# EAGLE board Batterycharger004 (EAGLE 7.1.0)
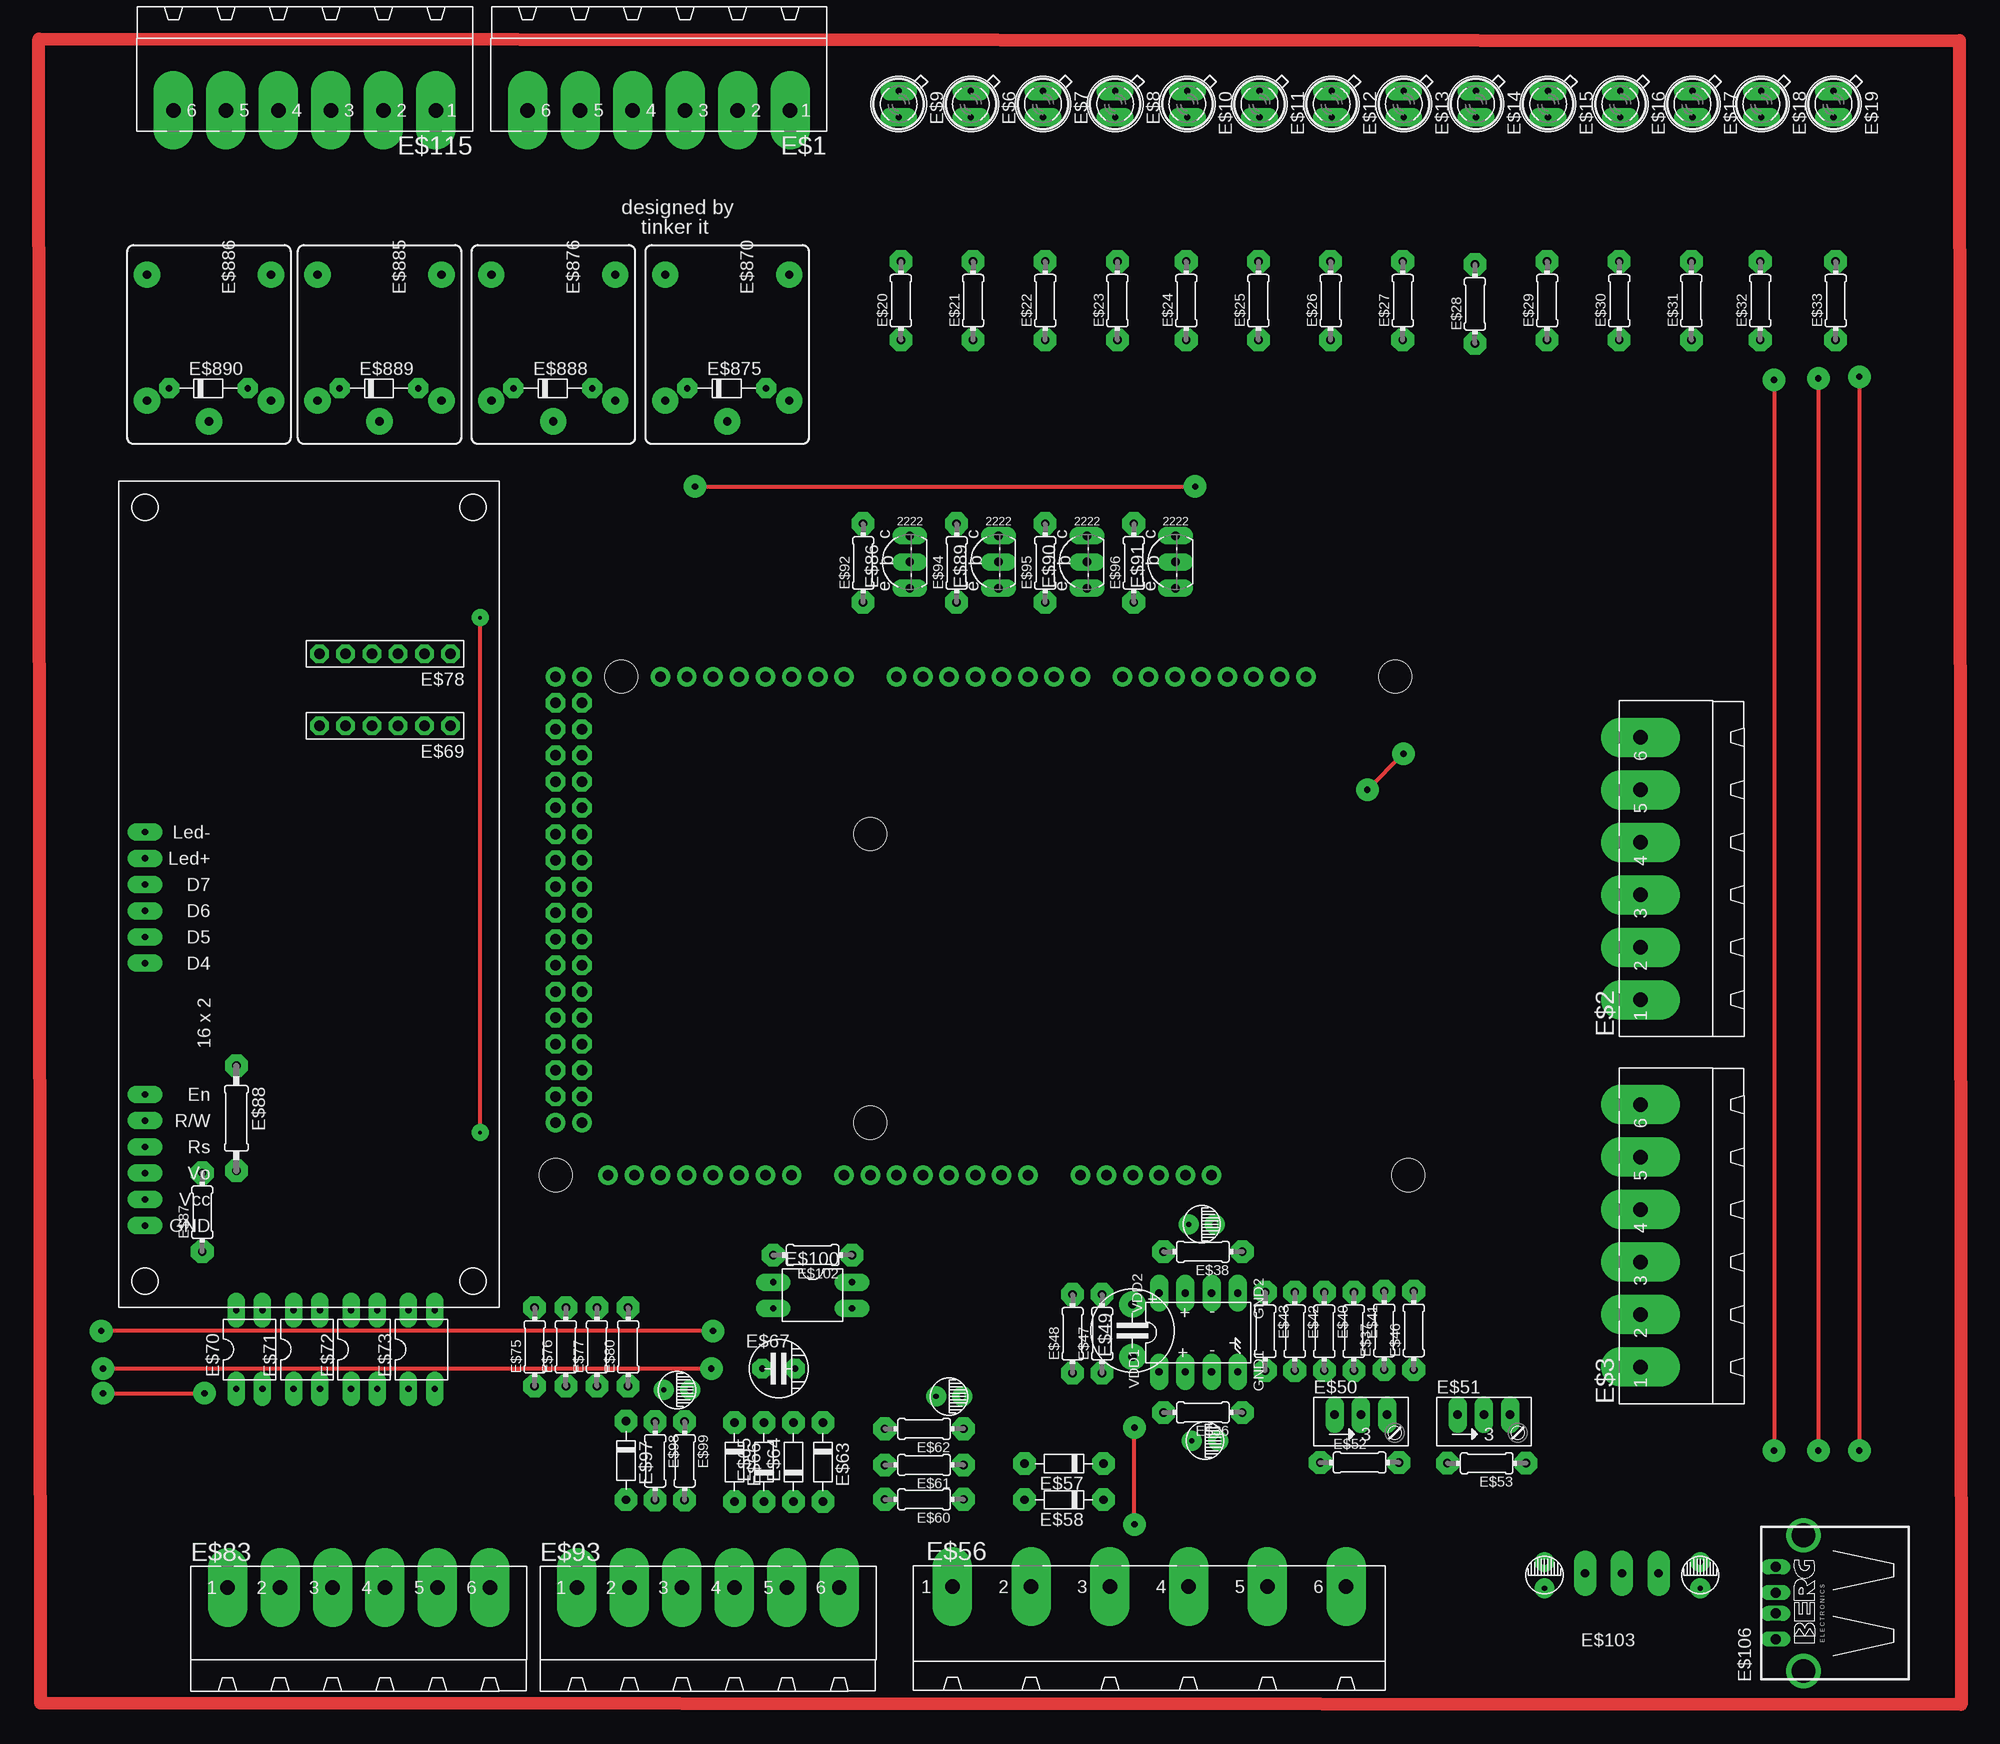
[diagram p0: board, top side]
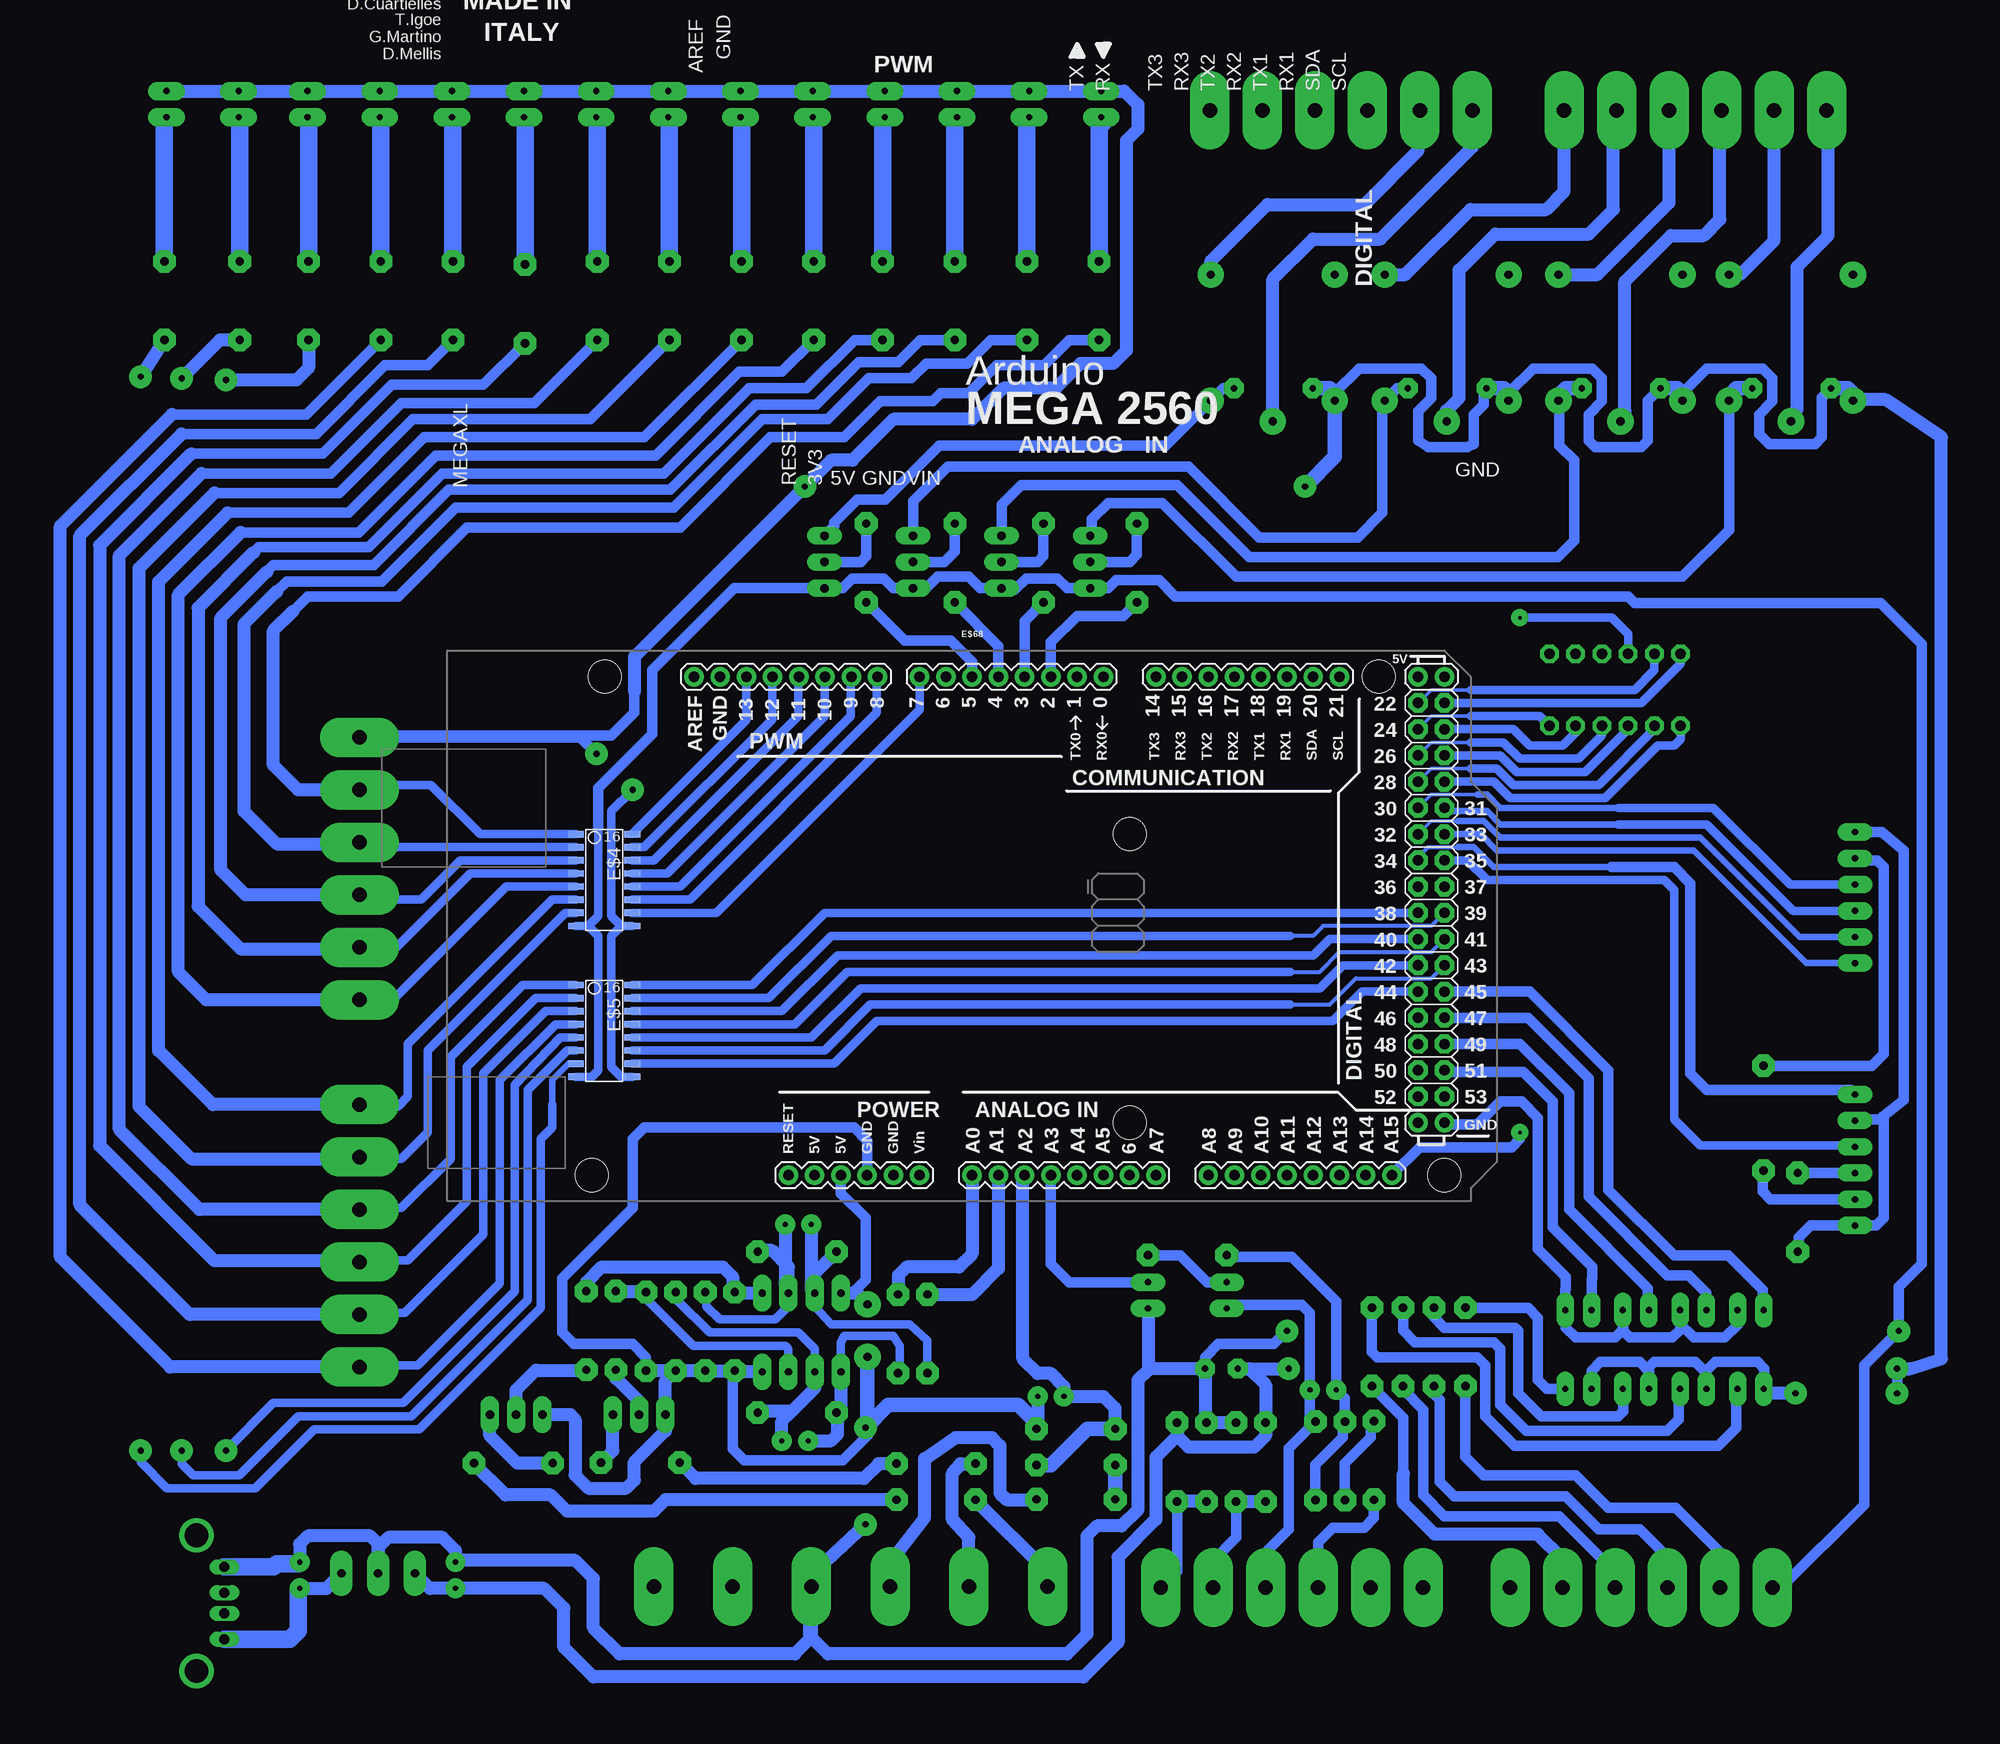
[diagram p1: board, bottom side, seen from below]

No outline drawn. Coordinates in mm, seen from the top.
Copper layers (1*16): Top 0.035mm / dielectric 1.5mm / Bottom 0.035mm
Design rules "default *": minimum track width 0.15mm, minimum drill 0.3mm, track to track 0.15mm, track to pad 0.1mm, pad to pad 0.15mm, via to via 0.15mm, smd to smd 0.15mm, copper to edge 0.6mm, drill to drill 0.3mm, minimum pad ring 10mil, minimum via ring 10mil, stop-mask expansion 2mil, vias tented up to drill 1mil, thermal gap 10mil

## Footprints (pad centres in the part's own frame; a part is rotated, then mirrored left to right if it is on the bottom)
CONNECTOR-1X6 = drill 1.397 pad 3.81 long: 1 -12.7,0; 2 -7.62,0; 3 -2.54,0; 4 2.54,0; 5 7.62,0; 6 12.7,0
SO-16 = smd 0.61 x 1.524: 1 -4.445,-2.794; 2 -3.175,-2.794; 3 -1.905,-2.794; 4 -0.635,-2.794; 5 0.635,-2.794; 6 1.905,-2.794; 7 3.175,-2.794; 8 4.445,-2.794; 9 4.445,2.667; 10 3.175,2.667; 11 1.905,2.667; 12 0.635,2.667; 13 -0.635,2.667; 14 -1.905,2.667; 15 -3.175,2.667; 16 -4.445,2.667
SFH480 = drill 0.61 pad 1.778 long: A 1.27,0; K -1.27,0
0204/7 = drill 0.813 pad 2.184 octagon: 1 -3.81,0; 2 3.81,0
DIL08 = drill 0.7 pad 1.778 long: 1 -3.81,-3.81; 2 -1.27,-3.81; 3 1.27,-3.81; 4 3.81,-3.81; 5 3.81,3.81; 6 1.27,3.81; 7 -1.27,3.81; 8 -3.81,3.81
C2-3 = drill 0.5 pad 1.93: P$1 1.27,0; P$2 -1.27,0
CAP-1 = drill 0.813 pad 2.54: P$1 -2.54,0; P$2 2.54,0
POT_001 = drill 0.813 pad 1.778 long: A 2.54,2.54; E -2.54,2.54; S 0,2.54
SCREW_TERMINAL_01 = drill 1.397 pad 3.81 long: 1 -19.05,5.08; 2 -11.43,5.08; 3 -3.81,5.08; 4 3.81,5.08; 5 11.43,5.08; 6 19.05,5.08
D7.5 = drill 0.813 pad 2.184 octagon: A 3.81,0; C -3.81,0
C5-4 = drill 0.61 pad 1.93 octagon: 1 -1.587,0; 2 1.587,0
ARDUINO_MEGA = drill 1.016 pad 1.88: 0 13.97,24.13; 1 11.43,24.13; 2 8.89,24.13; 3 6.35,24.13; 3.3V -13.97,-24.13; 4 3.81,24.13; 5 1.27,24.13; 5V@0 -11.43,-24.13; 5V@1 44.45,24.13; 5V@2 46.99,24.13; 6 -1.27,24.13; 7 -3.81,24.13; 8 -7.874,24.13; 9 -10.414,24.13; 10 -12.954,24.13; 11 -15.494,24.13; 12 -18.034,24.13; 13 -20.574,24.13; 14 19.05,24.13; 15 21.59,24.13; 16 24.13,24.13; 17 26.67,24.13; 18 29.21,24.13; 19 31.75,24.13; 20 34.29,24.13; 21 36.83,24.13; A0 1.27,-24.13; A1 3.81,-24.13; A2 6.35,-24.13; A3 8.89,-24.13; A4 11.43,-24.13; A5 13.97,-24.13; A6 16.51,-24.13; A7 19.05,-24.13; A8 24.13,-24.13; A9 26.67,-24.13; A10 29.21,-24.13; A11 31.75,-24.13; A12 34.29,-24.13; A13 36.83,-24.13; A14 39.37,-24.13; A15 41.91,-24.13; AREF -25.654,24.13; GND@0 -8.89,-24.13; GND@1 -6.35,-24.13; GND@2 44.45,-19.05; GND@3 46.99,-19.05; GND@4 -23.114,24.13; RESET -16.51,-24.13; VIN -3.81,-24.13 | drill 1.016 pad 1.88 octagon: 22 44.45,21.59; 23 46.99,21.59; 24 44.45,19.05; 25 46.99,19.05; 26 44.45,16.51; 27 46.99,16.51; 28 44.45,13.97; 29 46.99,13.97; 30 44.45,11.43; 31 46.99,11.43; 32 44.45,8.89; 33 46.99,8.89; 34 44.45,6.35; 35 46.99,6.35; 36 44.45,3.81; 37 46.99,3.81; 38 44.45,1.27; 39 46.99,1.27; 40 44.45,-1.27; 41 46.99,-1.27; 42 44.45,-3.81; 43 46.99,-3.81; 44 44.45,-6.35; 45 46.99,-6.35; 46 44.45,-8.89; 47 46.99,-8.89; 48 44.45,-11.43; 49 46.99,-11.43; 50 44.45,-13.97; 51 46.99,-13.97; 52 44.45,-16.51; 53 46.99,-16.51 | hole 3.2: -34.29,24.13; -35.56,-24.13; 16.51,8.89; 16.51,-19.05; 40.64,24.13; 46.99,-24.13
1X06-BIG = drill 1.016 pad 1.778 octagon: 1 -6.35,0; 2 -3.81,0; 3 -1.27,0; 4 1.27,0; 5 3.81,0; 6 6.35,0
DIL04 = drill 0.61 pad 1.676 long: 1 -1.27,-3.81; 2 1.27,-3.81; 3 1.27,3.81; 4 -1.27,3.81
LCD_16_2 = drill 0.61 pad 1.676 long: P$1 -16.192,0; P$2 -13.652,0; P$3 -11.113,0; P$4 -8.572,0; P$5 -6.032,0; P$6 16.828,0; P$7 14.287,0; P$8 11.748,0; P$9 9.207,0; P$10 6.668,0; P$22 -18.733,0; P$23 19.367,0
PN2222A = drill 0.813 pad 1.676 long: B 2.54,0; C 0,0; E -2.54,0
0207/10 = drill 0.813 pad 2.184 octagon: 1 -5.08,0; 2 5.08,0
TIP122 = drill 0.813 pad 2.184 long: 1 -3.556,0; 2 0,0; 3 3.556,0
PN87520-S = drill 0.95 long: 1 -3.5,2.71; 2 -1,2.71; 3 1,2.71; 4 3.5,2.71 | drill 2.3 pad 2.9: S1 -6.57,0; S2 6.57,0
JS-M = drill 0.8 pad 2.54: 1 6.7,6; 2 6.7,-6; C 8.7,0; NC -5.5,-6; NO -5.5,6
D-5 = drill 0.61 pad 1.93 octagon: A 3.81,0; C -3.81,0

## Placement (x,y rotation side)
E$1  [CONNECTOR-1X6]  -87.15,40.56 180 top
E$2  [CONNECTOR-1X6]  7.86,-32.86 90 top
E$3  [CONNECTOR-1X6]  7.86,-68.42 90 top
E$4  [SO-16]  -15.88,-33.97 270 bottom
E$5  [SO-16]  -15.88,-48.58 270 bottom
E$6  [SFH480]  -56.96,41.16 270 top
E$7  [SFH480]  -49.97,41.16 270 top
E$8  [SFH480]  -42.99,41.16 270 top
E$9  [SFH480]  -63.94,41.16 270 top
E$10  [SFH480]  -36,41.16 270 top
E$11  [SFH480]  -29.02,41.16 270 top
E$12  [SFH480]  -22.03,41.16 270 top
E$13  [SFH480]  -15.05,41.16 270 top
E$14  [SFH480]  -8.06,41.16 270 top
E$15  [SFH480]  -1.08,41.16 270 top
E$16  [SFH480]  5.91,41.16 270 top
E$17  [SFH480]  12.89,41.16 270 top
E$18  [SFH480]  19.56,41.16 270 top
E$19  [SFH480]  26.55,41.16 270 top
E$20  [0204/7]  -63.73,22.13 90 top
E$21  [0204/7]  -56.74,22.13 90 top
E$22  [0204/7]  -49.76,22.13 90 top
E$23  [0204/7]  -42.77,22.13 90 top
E$24  [0204/7]  -36.11,22.13 90 top
E$25  [0204/7]  -29.12,22.13 90 top
E$26  [0204/7]  -22.14,22.13 90 top
E$27  [0204/7]  -15.15,22.13 90 top
E$28  [0204/7]  -8.17,21.81 90 top
E$29  [0204/7]  -1.18,22.13 90 top
E$30  [0204/7]  5.8,22.13 90 top
E$31  [0204/7]  12.79,22.13 90 top
E$32  [0204/7]  19.46,22.13 90 top
E$33  [0204/7]  26.76,22.13 90 top
E$34  [DIL08]  -34.92,-77.79 0 top
E$36  [0204/7]  -34.49,-85.52 180 top
E$37  [0204/7]  -16.94,-77.59 90 top
E$38  [0204/7]  -34.49,-69.97 180 top
E$40  [0204/7]  -22.74,-77.67 270 top
E$41  [0204/7]  -19.89,-77.67 270 top
E$42  [0204/7]  -25.6,-77.67 270 top
E$43  [0204/7]  -28.46,-77.67 270 top
E$44  [C2-3]  -34.29,-88.27 0 top
E$45  [C2-3]  -34.61,-67.31 0 top
E$46  [0204/7]  -14.09,-77.59 90 top
E$47  [0204/7]  -44.25,-77.9 90 top
E$48  [0204/7]  -47.11,-77.9 90 top
E$49  [CAP-1]  -41.31,-77.6 90 top
E$50  [POT_001]  -19.21,-88.27 0 top
E$51  [POT_001]  -7.3,-88.27 0 top
E$52  [0204/7]  -19.32,-90.37 0 top
E$53  [0204/7]  -7.03,-90.44 180 top
E$56  [SCREW_TERMINAL_01]  -39.69,-107.47 0 top
E$57  [D7.5]  -47.94,-90.49 180 top
E$58  [D7.5]  -47.94,-93.98 180 top
E$59  [C2-3]  -59.05,-83.98 0 top
E$60  [0204/7]  -61.48,-93.94 180 top
E$61  [0204/7]  -61.48,-90.6 180 top
E$62  [0204/7]  -61.48,-87.11 180 top
E$63  [D7.5]  -71.28,-90.33 270 top
E$64  [D7.5]  -74.14,-90.33 90 top
E$65  [D7.5]  -76.99,-90.33 90 top
E$66  [D7.5]  -79.85,-90.33 270 top
E$67  [C5-4]  -75.56,-81.28 0 top
E$68  [ARDUINO_MEGA]  -50.16,-38.42 0 bottom
E$69  [1X06-BIG]  -113.67,-19.05 180 top
E$70  [DIL04]  -126.79,-79.42 0 top
E$71  [DIL04]  -121.24,-79.42 0 top
E$72  [DIL04]  -115.68,-79.42 0 top
E$73  [DIL04]  -110.12,-79.42 0 top
E$75  [0204/7]  -99.18,-79.17 90 top
E$76  [0204/7]  -96.16,-79.17 90 top
E$77  [0204/7]  -93.14,-79.17 90 top
E$78  [1X06-BIG]  -113.67,-12.06 180 top
E$80  [0204/7]  -90.13,-79.17 90 top
E$82  [LCD_16_2]  -136.9,-48.7 90 top
E$83  [CONNECTOR-1X6]  -116.2,-102.47 0 top
E$86  [PN2222A]  -62.87,-3.17 90 top
E$87  [0204/7]  -131.36,-66.14 90 top
E$88  [0207/10]  -128.05,-57.05 270 top
E$89  [PN2222A]  -54.29,-3.17 90 top
E$90  [PN2222A]  -45.72,-3.17 90 top
E$91  [PN2222A]  -37.15,-3.17 90 top
E$92  [0204/7]  -67.38,-3.27 90 top
E$93  [CONNECTOR-1X6]  -82.39,-102.47 0 top
E$94  [0204/7]  -58.33,-3.27 90 top
E$95  [0204/7]  -49.76,-3.27 90 top
E$96  [0204/7]  -41.19,-3.27 90 top
E$97  [D7.5]  -90.33,-90.17 270 top
E$98  [0204/7]  -87.51,-90.21 270 top
E$99  [0204/7]  -84.66,-90.21 270 top
E$100  [DIL04]  -72.28,-74.18 270 top
E$101  [C2-3]  -85.41,-83.34 0 top
E$102  [0204/7]  -72.27,-70.28 180 top
E$103  [TIP122]  6.06,-101.1 0 top
E$104  [C2-3]  -1.43,-101.28 90 top
E$105  [C2-3]  13.65,-101.28 90 top
E$106  [PN87520-S]  23.65,-103.98 90 top
E$115  [CONNECTOR-1X6]  -121.44,40.56 180 top
E$870  [JS-M]  -80.54,19.14 270 top
E$875  [D-5]  -80.59,13.64 0 top
E$876  [JS-M]  -97.37,19.14 270 top
E$885  [JS-M]  -114.19,19.14 270 top
E$886  [JS-M]  -130.71,19.14 270 top
E$888  [D-5]  -97.42,13.64 0 top
E$889  [D-5]  -114.25,13.64 0 top
E$890  [D-5]  -130.76,13.64 0 top

## Library data of the parts
E$1-E$3 E$34 E$44 E$45 E$50 E$51 E$56-E$59 E$63-E$67 E$83 E$93 E$97 E$101 E$104 E$105 E$115 = PERSONAL
E$4 E$5 = texas
E$6-E$19 = led
E$20-E$33 E$36-E$38 E$40-E$43 E$46-E$48 E$52 E$53 E$60-E$62 E$75-E$77 E$80 E$87 E$88 E$92 E$94-E$96 E$98 E$99 E$102 = resistor
E$49 E$82 = PERSONAL1
E$68 = SparkFun-Boards
E$69 E$78 = adafruit
E$70-E$73 E$100 = ic-package
E$86 E$89-E$91 = PERSONAL6
E$103 = PERSONAL3
E$106 = con-berg
E$870 E$876 E$885 E$886 = relay
E$875 E$888-E$890 = diode

## Nets
PA0: E$68.22 E$78.5
PA1: E$68.23 E$78.6
PA2: E$68.24 E$69.1
PA3: E$68.25 E$69.2
PA4: E$68.26 E$69.3
PA5: E$68.27 E$69.4
PA6: E$68.28 E$69.5
PA7: E$68.29 E$69.6
PK7: E$68.A15 E$78.4
S$2: E$2.5 E$4.1 E$20.1
S$3: E$2.4 E$4.2 E$21.1
S$4: E$2.3 E$4.3 E$22.1
S$5: E$2.2 E$4.4 E$23.1
S$7: E$2.1 E$4.5 E$24.1
S$8: E$3.6 E$4.6 E$25.1
S$9: E$4.16 E$68.13
S$11: E$4.15 E$68.12
S$12: E$68.33 E$82.P$10
S$13: E$68.32 E$82.P$9
S$14: E$68.31 E$82.P$8
S$15: E$68.30 E$82.P$7
S$16: E$68.34 E$82.P$5
S$17: E$68.35 E$82.P$3
S$18: E$82.P$4 E$82.P$22 E$82.P$23 E$87.1
S$19: E$82.P$2 E$87.2
S$20: E$82.P$1 E$88.2
S$21: E$82.P$6 E$88.1
S$22: E$91.B E$870.1 E$875.A
S$24: E$90.B E$876.1 E$888.A
S$25: E$73.2 E$75.2
S$26: E$86.C E$92.2
S$27: E$89.C E$94.2
S$28: E$90.C E$95.2
S$29: E$91.C E$96.2
S$30: E$68.2 E$92.1
S$32: E$4.14 E$68.11
S$33: E$68.3 E$94.1
S$35: E$68.4 E$95.1
S$36: E$68.5 E$96.1
S$37: E$4.13 E$68.10
S$38: E$4.12 E$68.9
S$39: E$4.11 E$68.8
S$40: E$3.5 E$4.7 E$26.1
S$41: E$3.4 E$5.1 E$27.1
S$42: E$3.3 E$5.2 E$28.1
S$43: E$3.2 E$5.3 E$29.1
S$44: E$3.1 E$5.4 E$30.1
S$45: E$9.A E$20.2
S$46: E$6.A E$21.2
S$47: E$7.A E$22.2
S$48: E$8.A E$23.2
S$49: E$10.A E$24.2
S$50: E$11.A E$25.2
S$51: E$12.A E$26.2
S$52: E$13.A E$27.2
S$53: E$14.A E$28.2
S$54: E$15.A E$29.2
S$55: E$16.A E$30.2
S$56: E$17.A E$31.2
S$57: E$18.A E$32.2
S$59: E$19.A E$33.2
S$61: E$5.5 E$31.1
S$62: E$4.10 E$68.7
S$63: E$115.6 E$886.C
S$64: E$68.45 E$70.4
S$65: E$5.16 E$68.38
S$66: E$5.15 E$68.39
S$67: E$5.14 E$68.40
S$68: E$5.13 E$68.41
S$69: E$5.12 E$68.42
S$70: E$5.11 E$68.43
S$71: E$5.10 E$68.44
S$72: E$52.1 E$57.C
S$73: E$34.2 E$36.1 E$40.1 E$44.P$1
S$74: E$34.3 E$37.2 E$41.1
S$75: E$34.1 E$36.2 E$44.P$2 E$47.1
S$76: E$34.5 E$43.1 E$46.2
S$77: E$34.6 E$38.1 E$42.1 E$45.P$1
S$78: E$34.7 E$38.2 E$45.P$2 E$48.1
S$80: E$2.6 E$4.9 E$5.9 E$6.K E$7.K E$8.K E$9.K E$10.K E$11.K E$12.K E$13.K E$14.K E$15.K E$16.K E$17.K E$18.K E$19.K E$63.C E$66.C E$67.1 E$70.1 E$71.1 E$72.1 E$73.1 E$103.1 E$104.P$2 E$870.2 E$875.C E$876.2 E$885.2 E$886.2 E$888.C E$889.C E$890.C
S$81: E$34.8 E$49.P$2 E$68.5V@0
S$82: E$47.2 E$68.A0
S$83: E$48.2 E$68.A1
S$84: E$37.1 E$50.S
S$85: E$46.1 E$51.S
S$86: E$56.3 E$60.1
S$87: E$50.A E$52.2
S$88: E$51.A E$53.2
S$89: E$53.1 E$58.C
S$90: E$56.1 E$58.A
S$91: E$56.2 E$57.A
S$92: E$115.5 E$886.NO
S$93: E$60.2 E$61.2
S$94: E$59.P$2 E$61.1 E$62.2 E$68.A2
S$95: E$72.2 E$76.2
S$97: E$63.A E$64.C E$93.6
S$98: E$65.C E$66.A E$93.5
S$99: E$5.6 E$32.1
S$100: E$5.7 E$33.1
S$101: E$71.2 E$77.2
S$102: E$70.2 E$80.2
S$103: E$80.1 E$83.5
S$104: E$77.1 E$83.4
S$105: E$76.1 E$83.3
S$106: E$75.1 E$83.2
S$108: E$68.47 E$71.4
S$109: E$68.49 E$72.4
S$110: E$68.51 E$73.4
S$112: E$68.GND@3 E$70.3 E$71.3 E$72.3 E$73.3
S$113: E$93.3 E$97.A
S$114: E$97.C E$98.2
S$115: E$98.1 E$99.2 E$101.P$2 E$102.2
S$116: E$93.4 E$99.1 E$100.2 E$101.P$1
S$117: E$100.1 E$102.1
S$118: E$68.A3 E$100.4
S$119: E$103.3 E$105.P$2 E$106.1
S$120: E$115.4 E$885.C
S$121: E$115.3 E$885.NO
S$122: E$115.2 E$876.C
S$123: E$115.1 E$876.NO
S$124: E$1.6 E$870.C
S$125: E$1.5 E$870.NO
S$126: E$4.8 E$5.8 E$34.4 E$40.2 E$41.2 E$42.2 E$43.2 E$49.P$1 E$50.E E$51.E E$56.4 E$59.P$1 E$62.1 E$64.A E$65.A E$67.2 E$68.GND@0 E$83.1 E$86.E E$89.E E$90.E E$91.E E$100.3 E$103.2 E$104.P$1 E$105.P$1 E$106.4
S$677: E$89.B E$885.1 E$889.A
S$679: E$86.B E$886.1 E$890.A

## Tracks (layer width: path | path; a pad name or v marks a point on that pad's centre or on a via)
PA0
  Bottom 0.356: E$68.22 -95.89,-15.56 -99.69,-15.56
  Bottom 0.813: -99.69,-15.56 -115.57,-15.56 -117.47,-13.65 E$78.5
PA1
  Bottom 0.813: E$68.23 -116.2,-16.83 -120.02,-13.02 E$78.6
PA2
  Bottom 0.356: E$68.24 -95.89,-18.1 -99.69,-18.1
  Bottom 0.813: -99.69,-18.1 -106.36,-18.1 E$69.1
PA3
  Bottom 0.813: E$68.25 -103.82,-19.37 -105.41,-20.95 -108.58,-20.95 -109.86,-19.68 E$69.2
PA4
  Bottom 0.356: E$68.26 -95.89,-20.64 -99.69,-20.64
  Bottom 0.813: -99.69,-20.64 -102.87,-20.64 -104.46,-22.23 -110.17,-22.23 -112.39,-20 E$69.3
PA5
  Bottom 0.813: E$68.27 -102.55,-21.91 -104.14,-23.5 -110.81,-23.5 -114.94,-19.37 E$69.4
PA6
  Bottom 0.356: E$68.28 -95.89,-23.18 -99.69,-23.18
  Bottom 0.813: -99.69,-23.18 -102.23,-23.18 -103.82,-24.77 -112.08,-24.77 -117.47,-19.37 E$69.5
PA7
  Bottom 0.813: E$69.6 -120.02,-20.32 -119.38,-20.95 -117.79,-20.95 -112.71,-26.04 -103.5,-26.04 -101.92,-24.45 E$68.29
PK7  (via drill 0.35 pad 1.65)
  Top 0.406: v-104.46,-58.42 v-104.46,-8.57
  Bottom 0.813: v-104.46,-8.57 -113.35,-8.57 -114.94,-10.16 E$78.4
  Bottom 1.016: E$68.A15 -94.78,-59.84 -103.67,-59.84 -104.46,-59.05 v-104.46,-58.42
S$2
  Bottom 0.813: E$4.1 -3.81,-29.53 0.95,-24.77 7.38,-24.77 E$2.5
  Bottom 1.016: E$20.1 -60.86,18.32 -58.42,15.88 -53.82,15.88 -51.12,13.18 -48.42,13.18 -47.62,12.38 -42.55,12.38 -39.05,8.89 -31.91,8.89 -23.18,0.16 -2.54,0.16 4.13,-6.51 12.86,-6.51 14.29,-7.94
  Bottom 1.27: E$2.5 13.81,-25.24 16.19,-22.86 16.19,-9.84 14.29,-7.94
S$3
  Bottom 0.813: E$4.2 7.38,-30.8 E$2.4
  Bottom 1.016: E$21.1 -53.24,18.32 -50.96,16.03 -46.99,16.03 -45.56,14.61 -41.43,14.61 -37.47,10.64 -31.11,10.64 -22.54,2.06 -1.43,2.06 5.71,-5.08 14.92,-5.08 15.95,-6.11
  Bottom 1.27: 15.88,-6.03 15.95,-6.11 19.05,-9.21 19.05,-27.3 15.88,-30.48 8.02,-30.48 E$2.4
S$4
  Bottom 0.813: E$4.3 -1.91,-32.07 1.91,-35.88 7.38,-35.88 E$2.3
  Bottom 1.016: E$22.1 -46.41,18.32 -44.29,16.19 -40.48,16.19 -36.35,12.06 -30.48,12.06 -22.23,3.81 -0.79,3.81 6.51,-3.49 16.19,-3.49 16.83,-4.13
  Bottom 1.27: E$2.3 18.89,-35.4 21.27,-33.02 21.27,-8.57 16.83,-4.13
S$5
  Bottom 0.813: E$4.4 -2.86,-33.34 4.45,-40.64 7.7,-40.64 E$2.2
  Bottom 1.016: E$23.1 -40.06,18.32 -35.4,13.65 -29.84,13.65 -21.59,5.4 -0.16,5.4 6.99,-1.75 17.62,-1.75 18.1,-2.22
  Bottom 1.27: 18.1,-2.22 23.5,-7.62 23.5,-36.51 19.37,-40.64 8.02,-40.64 E$2.2
S$7
  Bottom 0.813: E$4.5 -6.35,-34.61 4.45,-45.4 7.7,-45.4 E$2.1
  Bottom 1.016: 19.37,-0.32 7.94,-0.32 0.48,7.14 -20.8,7.14 -28.89,15.24 -33.03,15.24 E$24.1
  Bottom 1.27: E$2.1 22.7,-45.56 25.4,-42.86 25.4,-6.35 19.37,-0.32
S$8
  Bottom 0.813: E$4.6 -10.79,-35.88 3.17,-49.85 3.17,-54.93 4.13,-55.88 7.7,-55.88 E$3.6 7.7,-55.56
  Bottom 1.016: 20.64,1.59 8.89,1.59 1.59,8.89 -19.7,8.89 E$25.1
  Bottom 1.27: E$3.6 22.07,-55.72 27.3,-50.48 27.3,-5.08 20.64,1.59
S$9
  Bottom 0.813: E$4.16 -29.59,-18.48 E$68.13
S$11
  Bottom 0.813: E$4.15 -19.68,-30.8 -32.07,-18.41 -32.07,-14.35 E$68.12
S$12
  Bottom 0.61: E$68.33 -100.65,-29.53 -102.23,-31.11 -121.28,-31.11 -132.2,-42.03 E$82.P$10
S$13
  Bottom 0.356: E$68.32 -95.89,-28.26 -98.42,-28.26
  Bottom 0.61: E$82.P$9 -131.56,-39.49 -121.92,-29.84 -102.55,-29.84 -100.97,-28.26 -98.42,-28.26
S$14
  Bottom 0.61: E$68.31 -97.47,-27.3 -101.28,-27.3 -102.55,-28.57 -113.98,-28.57
  Bottom 0.813: E$82.P$8 -130.93,-36.95 -122.56,-28.57 -113.98,-28.57
S$15
  Bottom 0.356: E$68.30 -95.89,-25.72 -100.33,-25.72
  Bottom 0.61: -113.98,-26.99 -102.55,-26.99 -101.28,-25.72 -100.33,-25.72
  Bottom 0.813: E$82.P$7 -130.61,-34.41 -123.19,-26.99 -113.98,-26.99
S$16
  Bottom 0.406: E$68.34 -94.61,-31.75 -95.57,-30.8 -98.42,-30.8
  Bottom 0.61: -98.42,-30.8 -100.01,-30.8 -101.92,-32.7 -113.35,-32.7
  Bottom 1.016: -113.35,-32.7 -119.38,-32.7 -120.97,-34.29 -120.97,-52.7 -122.56,-54.29 -136.47,-54.29 E$82.P$5
S$17
  Bottom 0.813: E$68.35 -99.38,-32.07 -101.28,-33.97 -118.43,-33.97 -119.38,-34.92 -119.38,-57.15 -121.92,-59.69 -136.78,-59.69 E$82.P$3
S$18
  Bottom 1.016: E$82.P$23 -139.5,-29.33 -141.6,-31.11 -141.6,-55.24 -139.7,-56.83 | E$87.1 -131.44,-69.86 -131.44,-68.58 -132.6,-67.43 E$82.P$22 -138.95,-67.43 -139.7,-66.67 -139.7,-56.83 | -139.7,-56.83 -139.38,-57.15 -137.02,-57.15 E$82.P$4
S$19
  Bottom 1.016: E$87.2 -136.88,-62.33 E$82.P$2
S$20
  Bottom 1.016: E$82.P$1 -128.71,-64.89 -127.95,-64.14 -127.95,-62.23 E$88.2
S$21
  Bottom 1.016: E$88.1 -138.53,-51.97 -139.7,-50.8 -139.7,-32.7 -139.06,-32.07 -137.1,-32.07 E$82.P$6
S$22
  Bottom 1.016: E$875.A -75.74,13.64 E$870.1 -70.19,8.1 -48.26,8.1 -43.02,2.86 -40.32,2.86 -38.1,0.64 -38.1,0.32 E$91.B
S$24
  Bottom 1.016: E$90.B -45.72,2.7 -49.05,6.03 -72.39,6.03 -79.22,-0.79 -88.74,-0.79 -91.12,1.59 -91.12,12.2 E$876.1 -92.57,13.64 E$888.A
S$25
  Bottom 1.016: E$73.2 -107.05,-83.23 -106.2,-82.39 -106.2,-76.36 -105.25,-75.41 -99.22,-75.41 E$75.2
S$26
  Bottom 1.016: E$92.2 -67.38,-2.47 -66.67,-3.17 E$86.C
S$27
  Bottom 1.016: E$94.2 -58.33,-2.63 -57.78,-3.17 E$89.C
S$28
  Bottom 1.016: E$95.2 -49.76,-2.15 -48.74,-3.17 E$90.C
S$29
  Bottom 1.016: E$96.2 -41.19,-2.63 -40.64,-3.17 E$91.C
S$30
  Bottom 1.016: E$68.2 -59.05,-10.95 -61.59,-8.41 -66.05,-8.41 E$92.1
S$32
  Bottom 0.813: E$4.14 -20.64,-32.07 -34.61,-18.1 -34.61,-14.35 E$68.11
S$33
  Bottom 1.016: E$68.3 -56.52,-8.9 E$94.1
S$35
  Bottom 1.016: E$68.4 -53.98,-11.3 E$95.1
S$36
  Bottom 1.016: E$68.5 -51.44,-12.86 -49.37,-10.79 -44.9,-10.79 E$96.1
S$37
  Bottom 0.813: E$4.13 -21.91,-33.34 -37.15,-18.1 -37.15,-14.35 E$68.10
S$38
  Bottom 0.813: E$4.12 -23.18,-34.61 -39.69,-18.1 -39.69,-14.35 E$68.9
S$39
  Bottom 0.813: E$4.11 -24.13,-35.88 -42.23,-17.78 -42.23,-14.35 E$68.8
S$40
  Bottom 0.813: E$4.7 -12.06,-37.15 1.27,-50.48 1.27,-58.42 3.81,-60.96 7.7,-60.96 E$3.5 7.38,-60.33
  Bottom 1.016: 21.91,3.49 9.84,3.49 2.7,10.64 -14.46,10.64 E$26.1
  Bottom 1.27: 21.91,3.49 29.21,-3.81 29.21,-55.88 24.13,-60.96 8.02,-60.96 E$3.5
S$41
  Bottom 0.813: E$3.4 4.76,-65.88 | 4.76,-65.88 4.6,-65.88 | E$5.1 -7.94,-44.13 -0.95,-51.12 -0.95,-60.96 3.81,-65.72 4.6,-65.72 4.76,-65.88
  Bottom 1.016: 23.18,5.4 10.64,5.4 3.81,12.22 -9.06,12.22 E$27.1
  Bottom 1.27: E$3.4 23.34,-65.88 31.11,-58.1 31.11,-2.54 23.18,5.4
S$42
  Bottom 0.813: E$3.3 4.92,-70.96 4.76,-70.8 3.17,-70.8 -2.54,-65.09 -2.54,-52.07 -9.21,-45.4 E$5.2
  Bottom 1.016: 24.13,7.3 11.43,7.3 4.76,13.97 -4.14,13.97 E$28.1
  Bottom 1.27: 24.13,7.3 33.02,-1.59 33.02,-59.69 21.91,-70.8 8.02,-70.8 E$3.3
S$43
  Bottom 0.813: E$3.2 5.56,-76.04 5.4,-75.88 3.49,-75.88 -4.13,-68.26 -4.13,-52.7 -10.16,-46.67 E$5.3
  Bottom 1.016: 25.08,9.21 12.06,9.21 5.4,15.88 1.26,15.88 E$29.1
  Bottom 1.27: E$3.2 24.29,-76.04 34.92,-65.41 34.92,-0.64 25.08,9.21
S$44
  Bottom 0.813: E$3.1 5.87,-81.12 5.71,-80.96 2.22,-80.96 -5.71,-73.03 -5.71,-53.34 -11.11,-47.94 E$5.4
  Bottom 1.016: 26.04,11.11 13.01,11.11 E$30.1
  Bottom 1.27: E$3.1 26.19,-81.12 36.83,-70.48 36.83,0.32 26.04,11.11 | 5.71,18.23 E$30.1
S$45
  Bottom 1.676: E$20.2 -63.73,38.96 -64.14,39.37 -64.14,39.69 E$9.A
S$46
  Bottom 1.676: E$21.2 -56.74,39.67 E$6.A
S$47
  Bottom 1.676: E$22.2 -49.76,39.67 E$7.A
S$48
  Bottom 1.676: E$23.2 -42.77,39.67 E$8.A
S$49
  Bottom 1.676: E$24.2 -36.11,39.78 E$10.A
S$50
  Bottom 1.676: E$25.2 -29.12,39.78 E$11.A
S$51
  Bottom 1.676: E$26.2 -22.14,39.78 E$12.A
S$52
  Bottom 1.676: E$27.2 -15.15,39.78 E$13.A
S$53
  Bottom 1.676: E$28.2 -8.17,39.78 E$14.A
S$54
  Bottom 1.676: E$29.2 -1.18,39.78 E$15.A
S$55
  Bottom 1.676: E$30.2 5.8,39.78 E$16.A
S$56
  Bottom 1.676: E$31.2 12.79,39.78 E$17.A
S$57
  Bottom 1.676: E$32.2 19.46,39.78 E$18.A
S$59
  Bottom 1.676: E$33.2 26.76,39.67 E$19.A
S$61  (via drill 0.6 pad 2.18)
  Top 0.406: v20.8,14.45 v20.8,-89.22
  Bottom 0.813: v20.8,-89.22 16.19,-84.61 3.65,-84.61 -7.14,-73.82 -7.14,-53.82 -11.59,-49.21 E$5.5
  Bottom 1.27: E$31.1 12.79,15.63 13.97,14.45 v20.8,14.45
S$62
  Bottom 0.813: E$4.10 -26.67,-37.15 -46.35,-17.46 E$68.7
S$63
  Bottom 1.27: E$886.C -130.71,11.01 -131.29,11.59 -131.29,25.4 -134.3,28.42 -134.3,40.4 E$115.6
S$64
  Bottom 1.016: -128.06,-74.56 E$70.4 -127.95,-75.5 -127.95,-73.66 -124.62,-70.33 -119.38,-70.33 -113.03,-63.98 -113.03,-52.39 -105.41,-44.77 E$68.45
S$65
  Bottom 0.813: E$68.38 -37.15,-37.15 -30.16,-44.13 E$5.16
S$66
  Bottom 0.406: E$68.39 -95.89,-38.42 -85.41,-38.42 -84.45,-39.37 -82.23,-39.37
  Bottom 0.813: -82.23,-39.37 -37.78,-39.37 -31.75,-45.4 E$5.15
S$67
  Bottom 0.813: E$68.40 -86.04,-39.69 -84.45,-41.27 -38.42,-41.27 -33.02,-46.67 E$5.14
S$68
  Bottom 0.406: -82.23,-42.86 -85.09,-42.86 -87,-40.96 -95.89,-40.96 E$68.41
  Bottom 0.813: E$5.13 -34.29,-47.94 -39.37,-42.86 -82.23,-42.86
S$69
  Bottom 0.813: E$68.42 -87.31,-42.23 -85.09,-44.45 -40.64,-44.45 -35.88,-49.21 E$5.12
S$70
  Bottom 0.406: -82.23,-46.04 -86.04,-46.04 -88.58,-43.5 -95.89,-43.5 E$68.43
  Bottom 0.813: E$5.11 -37.15,-50.48 -41.59,-46.04 -82.23,-46.04
S$71
  Bottom 0.813: E$68.44 -89.22,-44.77 -86.36,-47.62 -42.23,-47.62 -38.1,-51.75 E$5.10
S$72
  Bottom 1.27: E$57.C -42.39,-90.49 -40.96,-91.92 -24.68,-91.92 E$52.1
S$73
  Bottom 0.813: E$34.2 -36.2,-79.38 -34.61,-77.79 -26.04,-77.79 -22.86,-74.61 -22.86,-73.98 E$40.1
  Bottom 1.27: E$34.2 -36.2,-83.19 -33.97,-85.41 | -33.97,-85.41 -30.8,-85.41 E$36.1 | E$44.P$1 -33.02,-86.36 -33.97,-85.41
S$74
  Bottom 0.813: E$34.3 -33.66,-79.38 -33.34,-79.06 -24.45,-79.06 -20,-74.61 -20,-73.98 E$41.1
  Bottom 1.27: E$41.1 -17.03,-73.86 E$37.2
S$75
  Bottom 0.813: E$34.1 -38.73,-78.74 -39.05,-78.11 -43.81,-78.11 -44.45,-79.06 -44.45,-81.51 E$47.1
  Bottom 1.27: E$34.1 -38.73,-85.09 E$36.2 -38.42,-85.64 -38.42,-87.63 -37.78,-88.27 E$44.P$2
S$76
  Bottom 1.27: E$34.5 -28.57,-73.98 E$43.1 -28.26,-73.66 -28.26,-72.39 -27.3,-71.44 -15.56,-71.44 -14.09,-72.91 E$46.2
S$77
  Bottom 0.813: E$34.6 -33.66,-75.25 -32.38,-76.52 -26.99,-76.52 -25.72,-75.25 -25.72,-73.98 E$42.1
  Bottom 1.27: E$34.6 -33.66,-73.34 | -33.66,-73.34 -33.66,-71.44 -32.07,-69.85 -30.8,-69.85 E$38.1 | E$45.P$1 -33.34,-73.03 -33.66,-73.34
S$78
  Bottom 0.813: E$48.1 -47.11,-78.54 -45.4,-76.99 -37.78,-76.99 -36.2,-75.25 E$34.7
  Bottom 1.27: E$38.2 -36.2,-72.07 E$34.7 -35.88,-73.66 E$45.P$2
S$79
  Top 1.27: -147.16,47.47 38.73,47.31 38.89,-113.82 -147,-113.67 -147.16,47.47
S$80  (via drill 0.6 pad 2.18)
  Top 0.406: v-82.07,-81.28 v-140.97,-81.28 | v-83.66,4.13 v-35.24,4.13 | v-140.97,-83.66 v-131.13,-83.66 | v-15.08,-21.75 v-18.57,-25.24
  Bottom 0.813: 2.86,-20 7.7,-20 | E$5.9 -17.46,-53.02 -16.51,-52.07 -16.51,-39.37 -17.46,-38.42 | E$4.9 -17.46,-38.42 | -17.46,-38.42 -16.51,-37.47 -16.51,-27.3 v-18.57,-25.24
  Bottom 1.016: E$870.2 -86.54,13.2 -88.9,15.56 -94.93,15.56 -95.89,14.61 -95.89,12.7 -94.61,11.43 -94.61,8.57 -95.57,7.94 -99.38,7.94 -100.01,8.26 -100.01,11.11 -100.97,12.06 -100.97,13.38 E$888.C -101.28,13.7 | E$876.2 -103.37,13.2 -105.73,15.56 -111.44,15.56 -112.39,14.61 -112.39,12.38 -111.12,11.11 -111.12,8.57 -111.76,7.94 -116.2,7.94 -116.84,8.57 -116.84,12.43 E$889.C | -120.33,13.02 -120.33,13.34 -122.56,15.56 -127.95,15.56 -128.91,14.61 -128.91,12.38 -127.64,11.11 -127.64,9.21 -128.59,8.26 -133.03,8.26 -133.67,8.89 -133.67,12.75 E$890.C | E$73.1 -111.39,-81.49 -112.24,-80.64 -116.05,-80.64 -117,-81.6 -117,-83.19 E$72.1 -116.95,-81.17 -117.47,-80.64 -121.44,-80.64 -122.4,-81.6 -122.4,-83.12 E$71.1 -122.51,-81.49 -123.35,-80.64 -127.48,-80.64 -128.11,-81.28 -128.11,-83.19 E$70.1 | -141.13,-81.44 v-140.97,-81.28 v-140.97,-83.66 | -18.73,-15.72 -18.73,-17.78 -16.51,-20 7.7,-20 E$2.6 -13.49,-20.16 v-15.08,-21.75
  Bottom 1.27: E$19.K E$18.K E$17.K E$16.K E$15.K E$14.K E$13.K E$12.K E$11.K E$10.K E$8.K E$7.K E$6.K E$9.K -66.16,42.42 -67.47,41.12 -67.47,38.73 -66.36,37.62 -66.36,17.3 -65.09,16.03 -61.91,16.03 -59.53,13.65 -54.45,13.65 -51.44,10.64 -43.81,10.64 -39.85,6.67 -37.78,6.67 v-35.24,4.13 -18.73,-12.38 -18.73,-15.72 | -71.28,-87.79 -72.39,-88.9 -78.74,-88.9 -79.85,-87.79 E$66.C -79.85,-82.87 -78.26,-81.28 E$67.1 v-82.07,-81.28 | v-140.97,-81.28 -142.24,-81.28 -145.26,-80.33 -145.26,8.89 -139.86,12.54 -136.8,12.54 E$886.2 | v-131.13,-83.66 -128.49,-83.66 E$70.1 | E$103.1 1.05,-102.55 E$104.P$2 -10,-102.55 -11.91,-104.46 -11.91,-108.27 -14.76,-111.12 -62.23,-111.12 -65.56,-107.79 -65.56,-99.54 -69.22,-95.89 -69.22,-89.85 -71.28,-87.79 | E$63.C -71.28,-87.79
  Bottom 1.422: E$875.C -86.05,13.64 -86.36,13.34 -86.36,12.62 E$870.2 -86.54,7.01 v-83.66,4.13 | E$888.C -102.88,13.64 -103.19,13.34 -103.19,12.62 E$876.2 | E$889.C -119.71,13.64 -120.33,13.02 -120.33,12.58 E$885.2 | E$890.C -136.22,13.64 -136.84,13.02 -136.84,12.58 E$886.2
S$81
  Bottom 1.016: E$34.8 -39.85,-73.98 -41.12,-72.71 -41.12,-66.67 -38.73,-64.29 E$68.5V@0
  Bottom 1.27: E$49.P$2 -41.31,-74.97 -40.32,-73.98 E$34.8
S$82
  Bottom 1.27: E$68.A0 -51.44,-70.17 -50.16,-71.44 -45.09,-71.44 -44.29,-72.23 -44.29,-74.05 E$47.2
S$83
  Bottom 1.27: E$68.A1 -53.98,-71.6 -51.44,-74.14 -47.15,-74.14 E$48.2
S$84
  Bottom 1.27: E$50.S -19.21,-84.45 -16.99,-82.23 -16.99,-81.44 E$37.1
S$85
  Bottom 1.27: E$51.S -7.3,-83.34 -9.21,-81.44 -14.04,-81.44 E$46.1
S$86
  Bottom 1.27: E$56.3 -43.5,-100.01 -46.83,-95.73 -46.83,-90.01 -49.85,-87.95 -53.34,-87.95 -54.13,-88.74 -54.13,-93.34 -54.77,-93.98 -57.47,-93.98 E$60.1
S$87
  Bottom 1.27: E$52.2 -16.67,-89.22 E$50.A
S$88
  Bottom 1.27: E$53.2 -7.42,-90.44 -4.76,-87.79 E$51.A
S$89
  Bottom 1.27: E$58.C -21.75,-93.98 -20.64,-95.09 -12.22,-95.09 -10.64,-93.5 -6.28,-93.5 E$53.1
S$90
  Bottom 1.27: E$56.1 -58.74,-100.97 E$58.A
S$91
  Bottom 1.27: E$56.2 -51.12,-97.63 -49.53,-95.89 -49.53,-91.44 -50.32,-90.49 E$57.A
S$92
  Bottom 1.27: E$886.NO -125.77,24.64 -129.06,27.94 E$115.5
S$93
  Bottom 1.422: E$60.2 E$61.2
S$94
  Bottom 1.27: E$62.2 -65.25,-87.07 -65.25,-85.09 -64.14,-83.98 E$59.P$2 -60.33,-83.03 -59.05,-81.76 -57.78,-81.76 -56.36,-80.33 -56.36,-62.71 E$68.A2
  Bottom 1.422: E$62.2 -62.59,-87.11 -59.05,-90.65 -57.71,-90.65 E$61.1
S$95
  Bottom 1.016: E$76.2 -96.16,-76.32 -97.16,-77.31 -103.98,-77.31 -104.3,-77.63 -104.3,-83.66 -106.52,-85.88 -113.98,-85.88 -114.46,-85.41 -114.46,-83.28 E$72.2
S$97
  Bottom 1.016: E$63.A -71.28,-100.89 E$93.6
  Bottom 1.27: E$64.C E$63.A
S$98
  Bottom 1.016: E$65.C -76.99,-97.63 -74.61,-100.01 -74.61,-102.31 E$93.5
  Bottom 1.27: E$65.C E$66.A
S$99  (via drill 0.6 pad 2.18)
  Top 0.406: v25.08,14.61 v25.08,-89.22
  Bottom 0.813: v25.08,-89.22 25.08,-90.49 23.97,-91.6 19.53,-91.6 13.81,-85.88 2.86,-85.88 -8.41,-74.61 -8.41,-54.29 -12.22,-50.48 E$5.6
  Bottom 1.27: E$32.1 21.37,18.32 v25.08,14.61
S$100  (via drill 0.6 pad 2.18)
  Top 0.406: v29.05,14.76 v29.05,-89.22
  Bottom 0.61: E$5.7 -12.38,-51.75 -10.79,-53.34 -10.79,-55.72
  Bottom 0.813: v29.05,-89.22 29.05,-90.33 26.51,-92.87 17.94,-92.87 12.22,-87.15 2.06,-87.15 -9.68,-75.41 -9.68,-59.05 -10.79,-57.94 -10.79,-55.72
  Bottom 1.27: E$33.1 v29.05,14.76
S$101
  Bottom 1.016: E$77.2 -93.14,-77.59 -94.3,-78.74 -101.92,-78.74 -102.55,-79.38 -102.55,-84.77 -105.09,-87.31 -118.75,-87.31 -119.86,-86.2 -119.86,-83.34 E$71.2
S$102
  Bottom 1.016: E$80.2 -90.13,-79.65 -90.65,-80.17 -100.33,-80.17 -101.12,-80.96 -101.12,-85.88 -103.98,-88.74 -123.67,-88.74 -125.41,-87 -125.41,-83.34 E$70.2
S$103
  Bottom 1.016: -93.19,-91.44 -93.19,-86.04 E$80.1
  Bottom 1.27: E$83.5 -108.58,-99.69 -106.2,-97.31 -96.2,-97.31 -93.19,-94.3 -93.19,-91.44
S$104
  Bottom 1.016: E$77.1 -93.14,-83.3 -95.09,-85.25 -95.09,-93.5 -97.16,-95.57 -108.27,-95.57 -113.51,-100.81 -113.51,-102.31 E$83.4
S$105
  Bottom 1.016: E$76.1 -96.16,-83.78 -96.68,-84.3 -96.68,-92.23 -98.11,-93.66 -108.9,-93.66 -112.08,-96.84 -116.05,-96.84 -118.9,-99.69 -118.9,-102.31 E$83.3
S$106
  Bottom 1.016: E$75.1 -99.18,-89.81 -100.97,-91.6 -109.86,-91.6 -113.03,-94.77 -119.54,-94.77 -123.98,-99.22 -123.98,-102.31 E$83.2
S$108
  Bottom 1.016: E$71.4 -122.51,-73.93 -120.81,-72.23 -118.75,-72.23 -111.12,-64.61 -111.12,-53.18 -105.25,-47.31 E$68.47
S$109
  Bottom 1.016: E$72.4 -116.95,-75.09 | -116.95,-75.09 -116.95,-74.56 | E$68.49 -104.46,-49.85 -109.22,-54.61 -109.22,-65.88 -116.84,-73.5 -116.84,-74.98 -116.95,-75.09
S$110
  Bottom 1.016: E$73.4 -111.39,-72.66 -111.44,-72.61 -111.44,-71.44 -107.63,-67.63 -107.63,-55.4 -104.78,-52.55 -97.31,-52.55 E$68.51
S$112
  Bottom 1.016: E$70.3 -125.52,-77.04 -124.3,-78.26 -121.28,-78.26 -119.86,-76.83 -119.86,-75.72 E$71.3 -119.97,-77.52 -119.22,-78.26 -115.09,-78.26 -114.46,-77.63 -114.46,-75.66 E$72.3 -114.41,-77.52 -113.67,-78.26 -109.86,-78.26 -108.9,-77.31 -108.9,-75.66 E$73.3 -108.86,-73.61 -108.9,-73.56 -108.9,-72.39 -106.2,-69.69 -106.2,-56.99 -104.62,-55.4 -102.55,-55.4 -100.33,-57.63 -97.31,-57.63 E$68.GND@3
S$113
  Bottom 1.016: E$93.3 -84.93,-98.11 -86.36,-96.68 -89.38,-96.68 -90.33,-95.73 E$97.A
S$114
  Bottom 1.016: E$98.2 -87.51,-90.44 -90.01,-87.95 -90.01,-86.68 E$97.C
S$115
  Bottom 1.016: E$99.2 -84.66,-90.6 -87.31,-87.95 -87.31,-86.6 E$98.1 -87.51,-84.18 E$101.P$2 -86.68,-74.77 -82.39,-70.48 -76.28,-70.48 E$102.2
S$116
  Bottom 1.016: E$93.4 -79.85,-99.06 -82.07,-96.84 -82.07,-88.98 -84.26,-86.8 | -84.26,-86.8 E$99.1 | -84.26,-86.8 -84.14,-86.68 E$101.P$1 -84.14,-75.88 -83.34,-75.09 -76.46,-75.09 E$100.2
S$117
  Bottom 1.016: E$100.1 -74.18,-72.91 -71.6,-70.33 -68.51,-70.33 E$102.1
S$118
  Bottom 1.016: E$100.4 -60.85,-72.91 -59.05,-71.12 E$68.A3
S$119
  Bottom 1.27: E$105.P$2 11.07,-102.55 E$103.3
  Bottom 1.676: E$106.1 14.61,-107.48 13.81,-106.68 13.81,-102.71 E$105.P$2
S$120
  Bottom 1.27: E$885.C -114.19,11.01 -114.62,11.43 -114.62,23.97 -119.06,28.42 -122.24,28.42 -123.83,30 -123.83,40.4 E$115.4
S$121
  Bottom 1.27: E$885.NO -111.96,24.64 -118.9,31.59 E$115.3
S$122
  Bottom 1.27: E$876.C -97.37,11.48 -98.58,12.7 -98.58,25.08 -102.08,28.57 -111.12,28.57 -113.51,30.96 -113.51,40.24 E$115.2
S$123
  Bottom 1.27: E$876.NO -93.38,24.64 -99.69,30.96 -107,30.96 -108.74,32.7 E$115.1
S$124
  Bottom 1.27: E$870.C -80.54,24.18 -84.45,28.1 -90.96,28.1 -99.85,36.99 E$1.6
S$125
  Bottom 1.27: E$870.NO -74.54,25.96 -80.01,31.43 -89.38,31.43 -94.61,36.67 -94.61,40.4 E$1.5
S$126  (via drill 0.6 pad 2.18)
  Top 0.406: v-81.92,-77.63 v-141.13,-77.63 | v-41.12,-96.36 v-41.12,-87
  Bottom 0.813: E$5.8 -14.61,-53.02 -15.24,-52.39 -15.24,-39.37 -14.29,-38.42 | E$4.8 -14.29,-38.42 | -14.29,-38.42 -15.24,-37.47 -15.24,-28.89
  Bottom 1.016: E$67.2 -73.98,-80.17 -75.25,-78.9 -80.64,-78.9 v-81.92,-77.63 | E$83.1 -129.78,-102.47 -137.79,-94.46 -137.79,-80.96 v-141.13,-77.63 -141.13,-73.34 -143.35,-71.12 -143.35,-11.11 -139.38,-7.14 -115.57,-7.14 -114.94,-6.51 -71.12,-6.51 -69.53,-4.92 -65.41,-4.92 -64.61,-5.71 E$86.E -60.64,-5.71 -59.69,-4.76 -56.67,-4.76 -55.56,-5.87 -54.45,-5.87 E$89.E -52.23,-5.71 -51.12,-4.6 -48.1,-4.6 -46.99,-5.71 E$90.E -43.81,-5.71 -42.86,-4.76 -39.85,-4.76 -38.89,-5.71 E$91.E -28.42,-5.71 -20.48,-13.65 -20.48,-19.84 -15.24,-25.08 -15.24,-28.89 | E$49.P$1 -41.31,-87.75 -38.89,-90.17 -29.37,-90.17 -28.26,-89.06 -28.26,-81.68 E$43.2 | E$68.GND@0 -41.27,-59.21 -40.01,-57.94 -19.68,-57.94 -18.57,-59.05 -18.57,-65.72 -11.75,-72.55 -11.75,-77.79 -12.86,-78.9 -18.57,-78.9 -19.84,-80.17 -19.84,-81.44 E$41.2 | 6.06,-101.39 E$103.2
  Bottom 1.27: E$65.A E$64.A -73.98,-86.36 E$67.2 -68.58,-81.28 -68.47,-81.39 | E$34.4 -28.57,-81.6 E$43.2 E$42.2 E$40.2 | E$40.2 E$41.2 | E$51.E -12.54,-85.72 -13.02,-86.2 -13.02,-91.6 -14.29,-92.87 -17.94,-92.87 -18.73,-92.08 -18.73,-90.33 -21.75,-87.31 E$50.E -21.75,-82.48 E$40.2 | E$56.4 -35.88,-101.28 v-41.12,-96.36 | E$59.P$1 -57.78,-87 E$62.1 | E$100.3 -68.47,-81.39 | -68.47,-81.39 -67.47,-82.39 -67.47,-94.93 -65.88,-96.52 -63.5,-96.52 -62.55,-97.47 -62.55,-107 -60.64,-108.9 -37.47,-108.9 -35.72,-107.16 -35.72,-102.55 E$56.4 | E$56.4 -35.88,-107.31 -34.29,-108.9 -17.3,-108.9 -14.76,-106.36 -14.76,-101.6 -13.02,-99.85 -1.59,-99.85 E$104.P$1 -1.43,-98.9 -0.16,-97.63 5.08,-97.63 6.03,-98.58 6.03,-101.07 E$103.2 6.06,-98.24 6.83,-97.47 12.86,-97.47 13.65,-98.27 E$105.P$1
  Bottom 1.422: E$49.P$1 -41.27,-80.18 -41.27,-86.68 v-41.12,-87 -43.34,-84.77 -55.88,-84.77 -57.67,-86.56 E$62.1
  Bottom 1.676: E$106.4 16.18,-100.48 15.88,-100.17 13.81,-100.17 E$105.P$1
S$677
  Bottom 1.016: E$89.B -54.29,2.38 -56.2,4.29 -71.28,4.29 -78.26,-2.7 -108.11,-2.7 -109.7,-1.11 -109.7,6.67 -108.27,8.1 -108.27,12.37 E$885.1
  Bottom 1.422: E$889.A -108.89,13.64 -108.27,13.02 -108.27,12.52 E$885.1
S$679
  Bottom 1.016: E$886.1 -124.7,-0.07 -120.17,-4.6 -76.99,-4.6 -69.85,2.54 -64.61,2.54 -63.02,0.95 -63.02,-0.48 E$86.B
  Bottom 1.422: E$890.A -125.4,13.64 -125.09,13.34 -125.09,12.83 E$886.1

## Text on the board
tNames: designed by | tinker it
bNames: 5V | M.Banzi | D.Cuartielles | MADE IN | T.Igoe | G.Martino | ITALY | D.Mellis | GND | PWM | AREF | SCL | SDA | RX1 | TX1 | RX2 | TX2 | RX3 | TX3 | RX | TX | DIGITAL | Arduino | MEGA 2560 | ANALOG IN | GND | VIN | GND | 5V | 3V3 | RESET | MEGAXL
tValues: PC7 | PC5 | PC3 | LCD | PC1 | D7 | D6 | D5 | D4
ReferenceLC: L | TX | RX | PC1 | PC2